# Allegro board ESP8266_Finish.brd
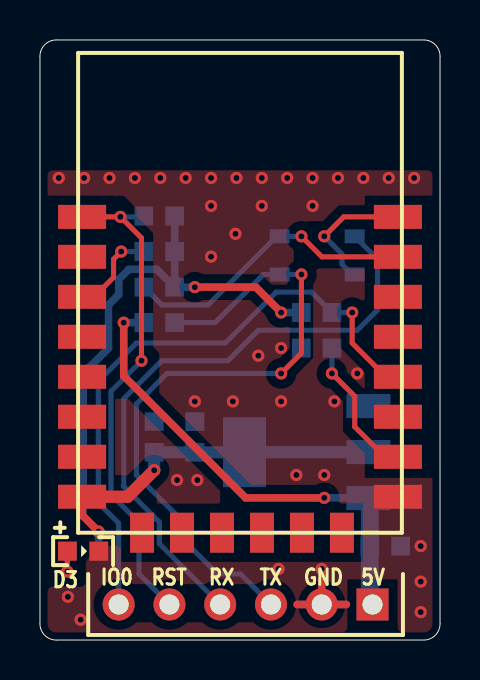
[diagram p0: board, top side]
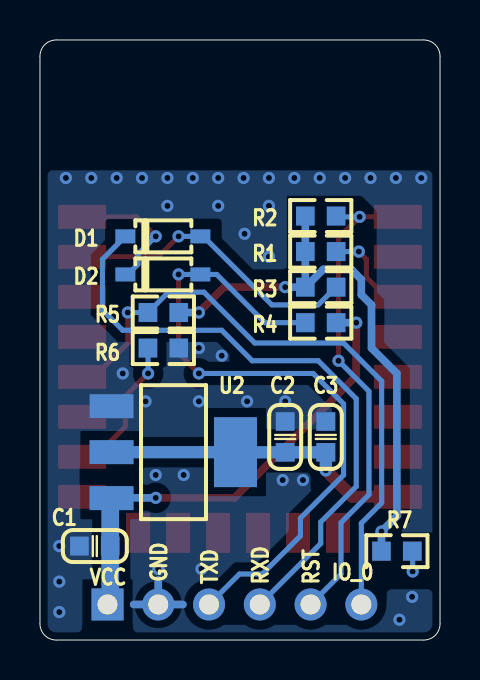
[diagram p1: board, bottom side, seen from below]

Outline 20.02 x 30.02 mm; copper layers: TOP, BOTTOM. Coordinates in mm from the lower left corner of the outline.
Outline path: 0,29.21 arc(0.24,29.78) 0.81,30.02 19.21,30.02 arc(19.78,29.78) 20.02,29.21 20.02,0.81 arc(19.78,0.24) 19.21,0 0.81,0 arc(0.24,0.24) 0,0.81 0,29.21

## Design rules (mm)
net group PWR: nets VCC VCC_3V3

## Placement (name value [footprint] x y rotation side)
C1  1uF  [C_0603_2]  17.27 4.7 0 bottom
C2  1uF  [C_0603_2]  7.75 10.16 90 bottom
C3  104  [C_0603_2]  5.71 10.16 90 bottom
D1  DIODE  [SOD-123]  15.74 20.19 180 bottom
D2  DIODE  [SOD-123]  15.74 18.29 180 bottom
D3  LED  [LED_0603]  2.16 4.45 0 top
J1  HEADER 6  [PIN_6]  16.64 1.78 180 top
NOREF  -  []  19.13 0 90 top
NOREF#2  -  []  0 29.21 0 top
R1  1k  [R_0603]  5.97 19.43 0 bottom
R2  1k  [R_0603]  5.97 21.21 0 bottom
R3  5.6k  [R_0603]  5.97 17.65 0 bottom
R4  5.6k  [R_0603]  5.97 15.88 180 bottom
R5  5.6k  [R_0603]  13.84 16.38 180 bottom
R6  5.6k  [R_0603]  13.84 14.61 180 bottom
R7  510R  [R_0603]  2.16 4.45 0 bottom
U1  esp8266  [ESP8266]  17.91 7.17 180 top
U2  AMS1117-3V3  [SOT_223]  13.34 9.4 270 bottom

## Library data of the parts
C1-C3 = CAP NP
D1 D2 = DIODE
D3 = LED
J1 = HEADER 6
R1-R7 = R
U1 = esp8266
U2 = AMS1117-3V3

## Footprints (pads in the part's own frame, mm; a bottom-side part is the same pattern mirrored in y, then rotated)
C_0603_2
  rect 0.93x0.95 smd: 1(-0.77,0) 2(0.77,0)
ESP8266
  rect 2.4x1.2 smd: 1(0,0) 2(0,-2) 3(0,-4) 4(0,-6) 5(0,-8) 6(0,-10) 7(0,-12) 8(0,-14) 9(15.8,-14) 10(15.8,-12) 11(15.8,-10) 12(15.8,-8) 13(15.8,-6) 14(15.8,-4) 15(15.8,-2) 16(15.8,0)
  rect 1.2x2 smd: 17(12.8,1.8) 18(10.8,1.8) 19(8.8,1.8) 20(6.8,1.8) 21(4.8,1.8) 22(2.8,1.8)
LED_0603
  rect 0.93x0.95 smd: 1(0.79,0) 2(-0.79,0)
PIN_6
  rect 1.6x1.6 hole 1: 1(0,0)
  round 1.6 hole 1: 2(2.54,0) 3(5.08,0) 4(7.62,0) 5(10.16,0) 6(12.7,0)
R_0603
  rect 0.93x0.95 smd: 1(-0.77,0) 2(0.77,0)
SOD-123
  rect 1x0.7 smd: 1(0,0) 2(3.75,0)
SOT_223
  rect 1.2x2.2 smd: 1(-2.3,-3.1) 2(0,-3.1) 3(2.3,-3.1)
  rect 3.5x2.15 smd: 4(0,3.1)

## Nets
GND: C1.2 C2.2 C3.2 D3.1(CATHODE) J1.2 R6.2 U1.1(GND) U2.1(GND)
VCC: C1.1 J1.1 R4.2 U2.3(IN)
VCC_3V3: C2.1 C3.1 R1.2 R2.2 R3.2 R5.2 R7.2 U1.16(VCC) U2.2(OUT1) U2.4(OUT2)
GPIO_0: J1.6 R5.1 U1.4(GPIO0)
GPIO_15: R6.1 U1.2(GPIO15)
REST: J1.5 R2.1 U1.9(RESET)
RXD_TTL: D1.1(K) J1.4
TXD_TTL: D2.2(A) J1.3 R4.1
N00269: R1.1 U1.11(CH_PD)
N00585: D1.2(A) R3.1 U1.7(RXD)
N00589: D2.1(K) U1.8(TXD)
N01771: D3.2(ANODE) R7.1

Pads without a net: U1 3 5 6 10 12 13 14 15 17 18 19 20 21 22

## Via types
v1: diameter 0.61, hole 0.305, TOP to BOTTOM, 54 vias

## Routing (per net, layer and track width the routed paths; a pad name or vN(x,y) marks a point on that pad's centre or on a via; arc(x,y) is an arc through that point)
GND: length 7.4
  TOP w0.381: 12.87,1.78 J1.2 ; J1.2 14.1,3.01 ; J1.2 15.33,1.78
  BOTTOM w0.381: J1.2 14.1,3.01 ; J1.2 12.87,1.78 ; J1.2 15.33,1.78
  vias: v1(0.94,23.11) v1(1.4,2.16) v1(2.03,1.02) v1(2.21,23.11) v1(3.48,23.11) v1(4.75,23.11) v1(6.02,23.11) v1(6.86,8) v1(7.29,23.11) v1(7.75,11.94) v1(7.87,8) v1(8.56,23.11) v1(8.56,21.72) v1(8.56,19.18) v1(9.65,11.94) v1(9.83,23.11) v1(9.78,20.32) v1(10.92,14.22) v1(11.1,23.11) v1(11.1,21.72) v1(11.94,3.56) v1(12.07,14.61) v1(12.07,11.94) v1(12.37,23.11) v1(12.83,8.26) v1(13.64,23.11) v1(13.64,21.72) v1(14.1,3.56) v1(14.22,8.26) v1(14.73,11.94) v1(14.91,23.11) v1(15.88,13.34) v1(16.18,23.11) v1(17.45,23.11) v1(18.72,23.11) v1(19.05,4.7) v1(19.05,2.92) v1(19.05,1.4)
VCC: length 23.9
  TOP w0.381: v1(14.22,7.11) 10.29,7.11 4.19,13.21 v1(4.19,15.88)
  BOTTOM w0.381: v1(14.22,7.11) 16.42,7.11 U2.3 ; v1(4.19,15.88) R4.2
  BOTTOM w0.889: U2.3 16.5,7.03 C1.1 16.5,1.91 J1.1
VCC_3V3: length 46.3
  TOP w0.381: U1.16 2.11,6.25 v1(2.93,5.43) ; v1(7.75,17.65) 10.8,17.65 v1(12.07,16.38)
  TOP w0.61: U1.16 4.39,7.17 v1(5.71,8.49)
  BOTTOM w0.381: R3.2 6.73,17.65 5.84,18.54 4.45,18.54 3.94,18.03 3.94,17.27 3.43,16.76 3.43,14.61 2.16,13.34 2.16,6.2 v1(2.93,5.43) R7.2 ; R3.2 R1.2 R2.2 ; R3.2 v1(7.75,17.65) ; R5.2 v1(12.07,16.38)
  BOTTOM w0.61: U2.2 U2.4 10.23,9.39 C2.1 C3.1 v1(5.71,8.49)
GPIO_0: length 31.1
  TOP w0.254: U1.4 17.31,13.17 15.62,14.85 v1(15.62,16.38)
  BOTTOM w0.254: J1.6 3.94,5.84 2.92,6.86 2.92,12.95 4.83,14.86 9.27,14.86 11.81,17.4 13.59,17.4 14.61,16.38 R5.1 v1(15.62,16.38)
GPIO_15: length 7.2
  TOP w0.254: U1.2 17.25,9.17 15.75,10.67 15.75,12.19 v1(14.61,13.34)
  BOTTOM w0.254: R6.1 14.61,14.6 v1(14.61,13.34)
REST: length 24.8
  TOP w0.254: U1.9 v1(4.02,21.17) 5.08,20.11 v1(5.08,13.97)
  BOTTOM w0.254: v1(5.08,13.97) 3.56,12.45 3.56,7.27 4.95,5.87 4.95,3.3 J1.5 ; R2.1 5.16,21.17 v1(4.02,21.17)
RXD_TTL: length 31
  BOTTOM w0.254: D1.1 16.89,19.04 16.89,16.51 15.88,15.49 10.92,15.49 9.4,13.97 6.1,13.97 4.19,12.06 4.19,7.68 5.97,5.9 5.97,4.83 J1.4
TXD_TTL: length 34.1
  TOP w0.254: v1(13.08,18.29) 13.08,14.35 v1(12.07,13.34)
  BOTTOM w0.254: v1(12.07,13.34) 6.35,13.34 4.83,11.81 4.83,8.26 6.99,6.1 6.99,5.21 8.89,3.3 10.03,3.3 J1.3 ; v1(13.08,18.29) D2.2 11.18,18.29 8.76,15.88 R4.1
N00269: length 4.6
  TOP w0.254: U1.11 2.71,17.17 3.68,18.14 3.68,19.05 v1(4.06,19.43)
  BOTTOM w0.254: R1.1 v1(4.06,19.43)
N00585: length 14.9
  TOP w0.254: v1(13.08,20.19) 14.11,19.17 U1.7
  BOTTOM w0.254: v1(13.08,20.19) D1.2 11.84,20.19 8.41,16.76 6.1,16.76 5.21,17.65 R3.1
N00589: length 6.7
  TOP w0.254: v1(14.22,20.19) 15.2,21.17 U1.8
  BOTTOM w0.254: v1(14.22,20.19) 15.11,19.3 15.11,18.8 15.62,18.29 D2.1
N01771: length 2
  TOP w0.254: D3.2 v1(1.37,3.43)
  BOTTOM w0.254: v1(1.37,3.43) 1.37,4.43 R7.1

## Copper pours and planes (outline as drawn; the poured copper is in the pictures)
GND on TOP: 0.81,0.38 0.51,0.51 0.38,0.81 0.38,2.41 0.46,2.59 0.64,2.67 2.03,2.67 2.21,2.74 2.29,2.92 2.29,3.83 2.31,3.93 2.36,4.01 2.47,4.12 2.52,4.2 2.54,4.3 2.54,4.45 2.61,4.62 2.79,4.7 3.83,4.7 3.93,4.68 4.01,4.62 3.99,4.65 4.05,4.6 4.13,4.58 4.2,4.6 4.25,4.64 4.3,4.71 4.32,4.8 4.32,4.83 4.45,4.83 4.45,6.35 4.37,6.53 4.19,6.6 3.05,6.6 2.87,6.53 2.79,6.35 2.79,5.84 2.72,5.66 2.54,5.59 2.18,5.59 2.19,5.61 1.76,6.04 1.68,6.09 1.58,6.11 0.64,6.11 0.46,6.04 0.38,5.86 0.38,5.63 0.46,5.45 0.64,5.38 1.52,5.38 1.7,5.3 1.78,5.12 1.78,4.95 1.85,4.77 2.21,4.62 2.29,4.45 2.29,4.32 2.21,4.14 2.03,4.06 0.64,4.06 0.46,4.14 0.38,4.32 0.38,23.24 0.46,23.42 0.64,23.5 19.38,23.5 19.56,23.42 19.63,23.24 19.63,0.81 19.51,0.51 19.21,0.38 18.16,0.38 17.98,0.46 17.83,0.81 17.65,0.89 15.62,0.89 15.44,0.81 15.29,0.46 15.11,0.38 ; 8 cut-outs
GND on BOTTOM: 0.81,0.38 0.51,0.51 0.38,0.81 0.38,2.29 0.46,2.47 0.64,2.54 2.41,2.54 2.59,2.47 2.67,2.29 2.67,1.91 2.74,1.73 2.92,1.65 3.05,1.65 3.23,1.73 3.3,1.91 3.3,2.29 3.38,2.47 3.56,2.54 3.43,2.54 3.61,2.61 3.68,2.79 3.68,3.56 3.61,3.74 3.43,3.81 0.64,3.81 0.46,3.88 0.38,4.06 0.38,23.24 0.46,23.42 0.64,23.5 19.38,23.5 19.56,23.42 19.63,23.24 19.63,0.81 19.51,0.51 19.21,0.38 18.16,0.38 17.98,0.46 17.91,0.64 17.91,0.76 17.83,0.94 17.65,1.02 15.62,1.02 15.44,0.94 15.37,0.76 15.37,0.64 15.29,0.46 15.11,0.38 ; 15 cut-outs

## Text on the board
Ref Des/Silkscreen Bottom: IO_0 | VCC | RST | RXD | TXD | GND
Ref Des/Silkscreen Top: IO0 | RST | RX | TX | GND | 5V
COMPVAL_TYPE_TOP: FIGURE | SIZE | 12.0 | 39.37 | DRILL CHART: TOP to BOTTOM | ALL UNITS ARE IN MILS | PLATED | QTY | 54 | 6
